# Altium PCB VCO.PcbDoc
Units mil, origin at the board's own origin, x right, y up, seen from the top; angles counter-clockwise.
Board outline 4000 x 4000 mil, 4 copper layers (Top Layer, GND, GND (Mid2), Bottom Layer), stack 30.634 mil thick; 243 components, 98 nets, 601 pads, 3 vias.
Unrouted connection lines stored in the file: 407.
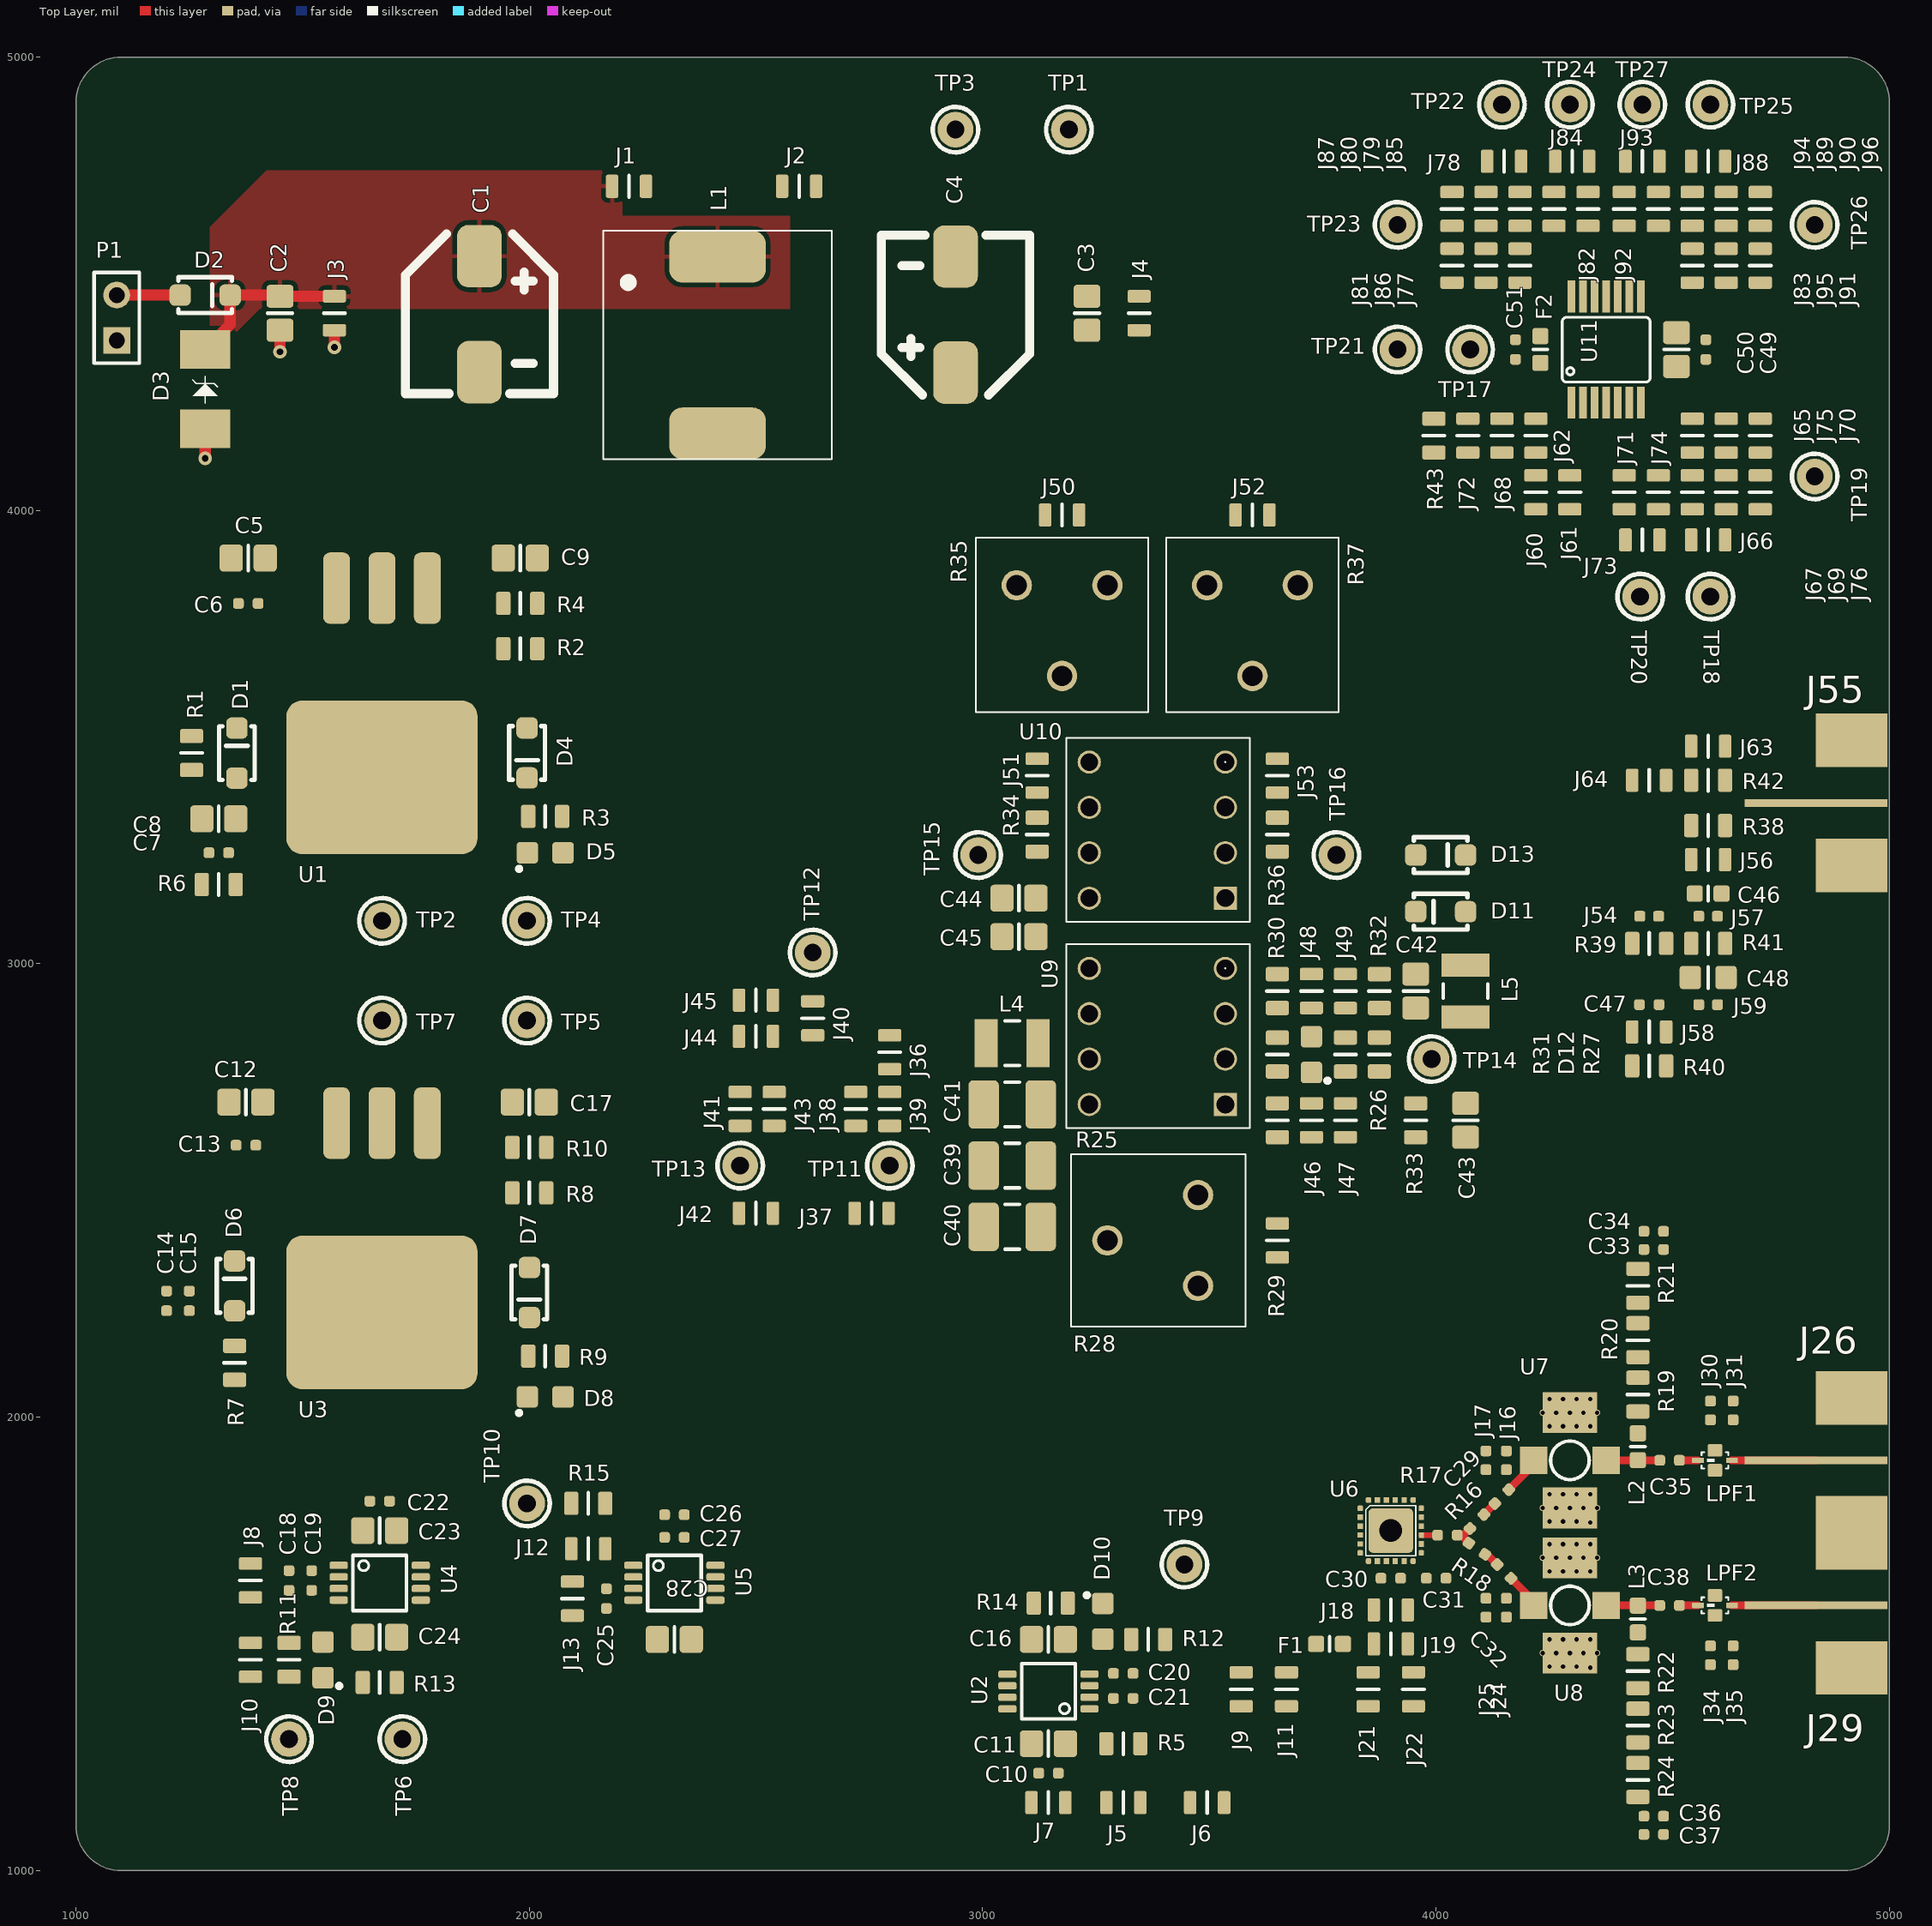
[diagram p0: Top Layer view]
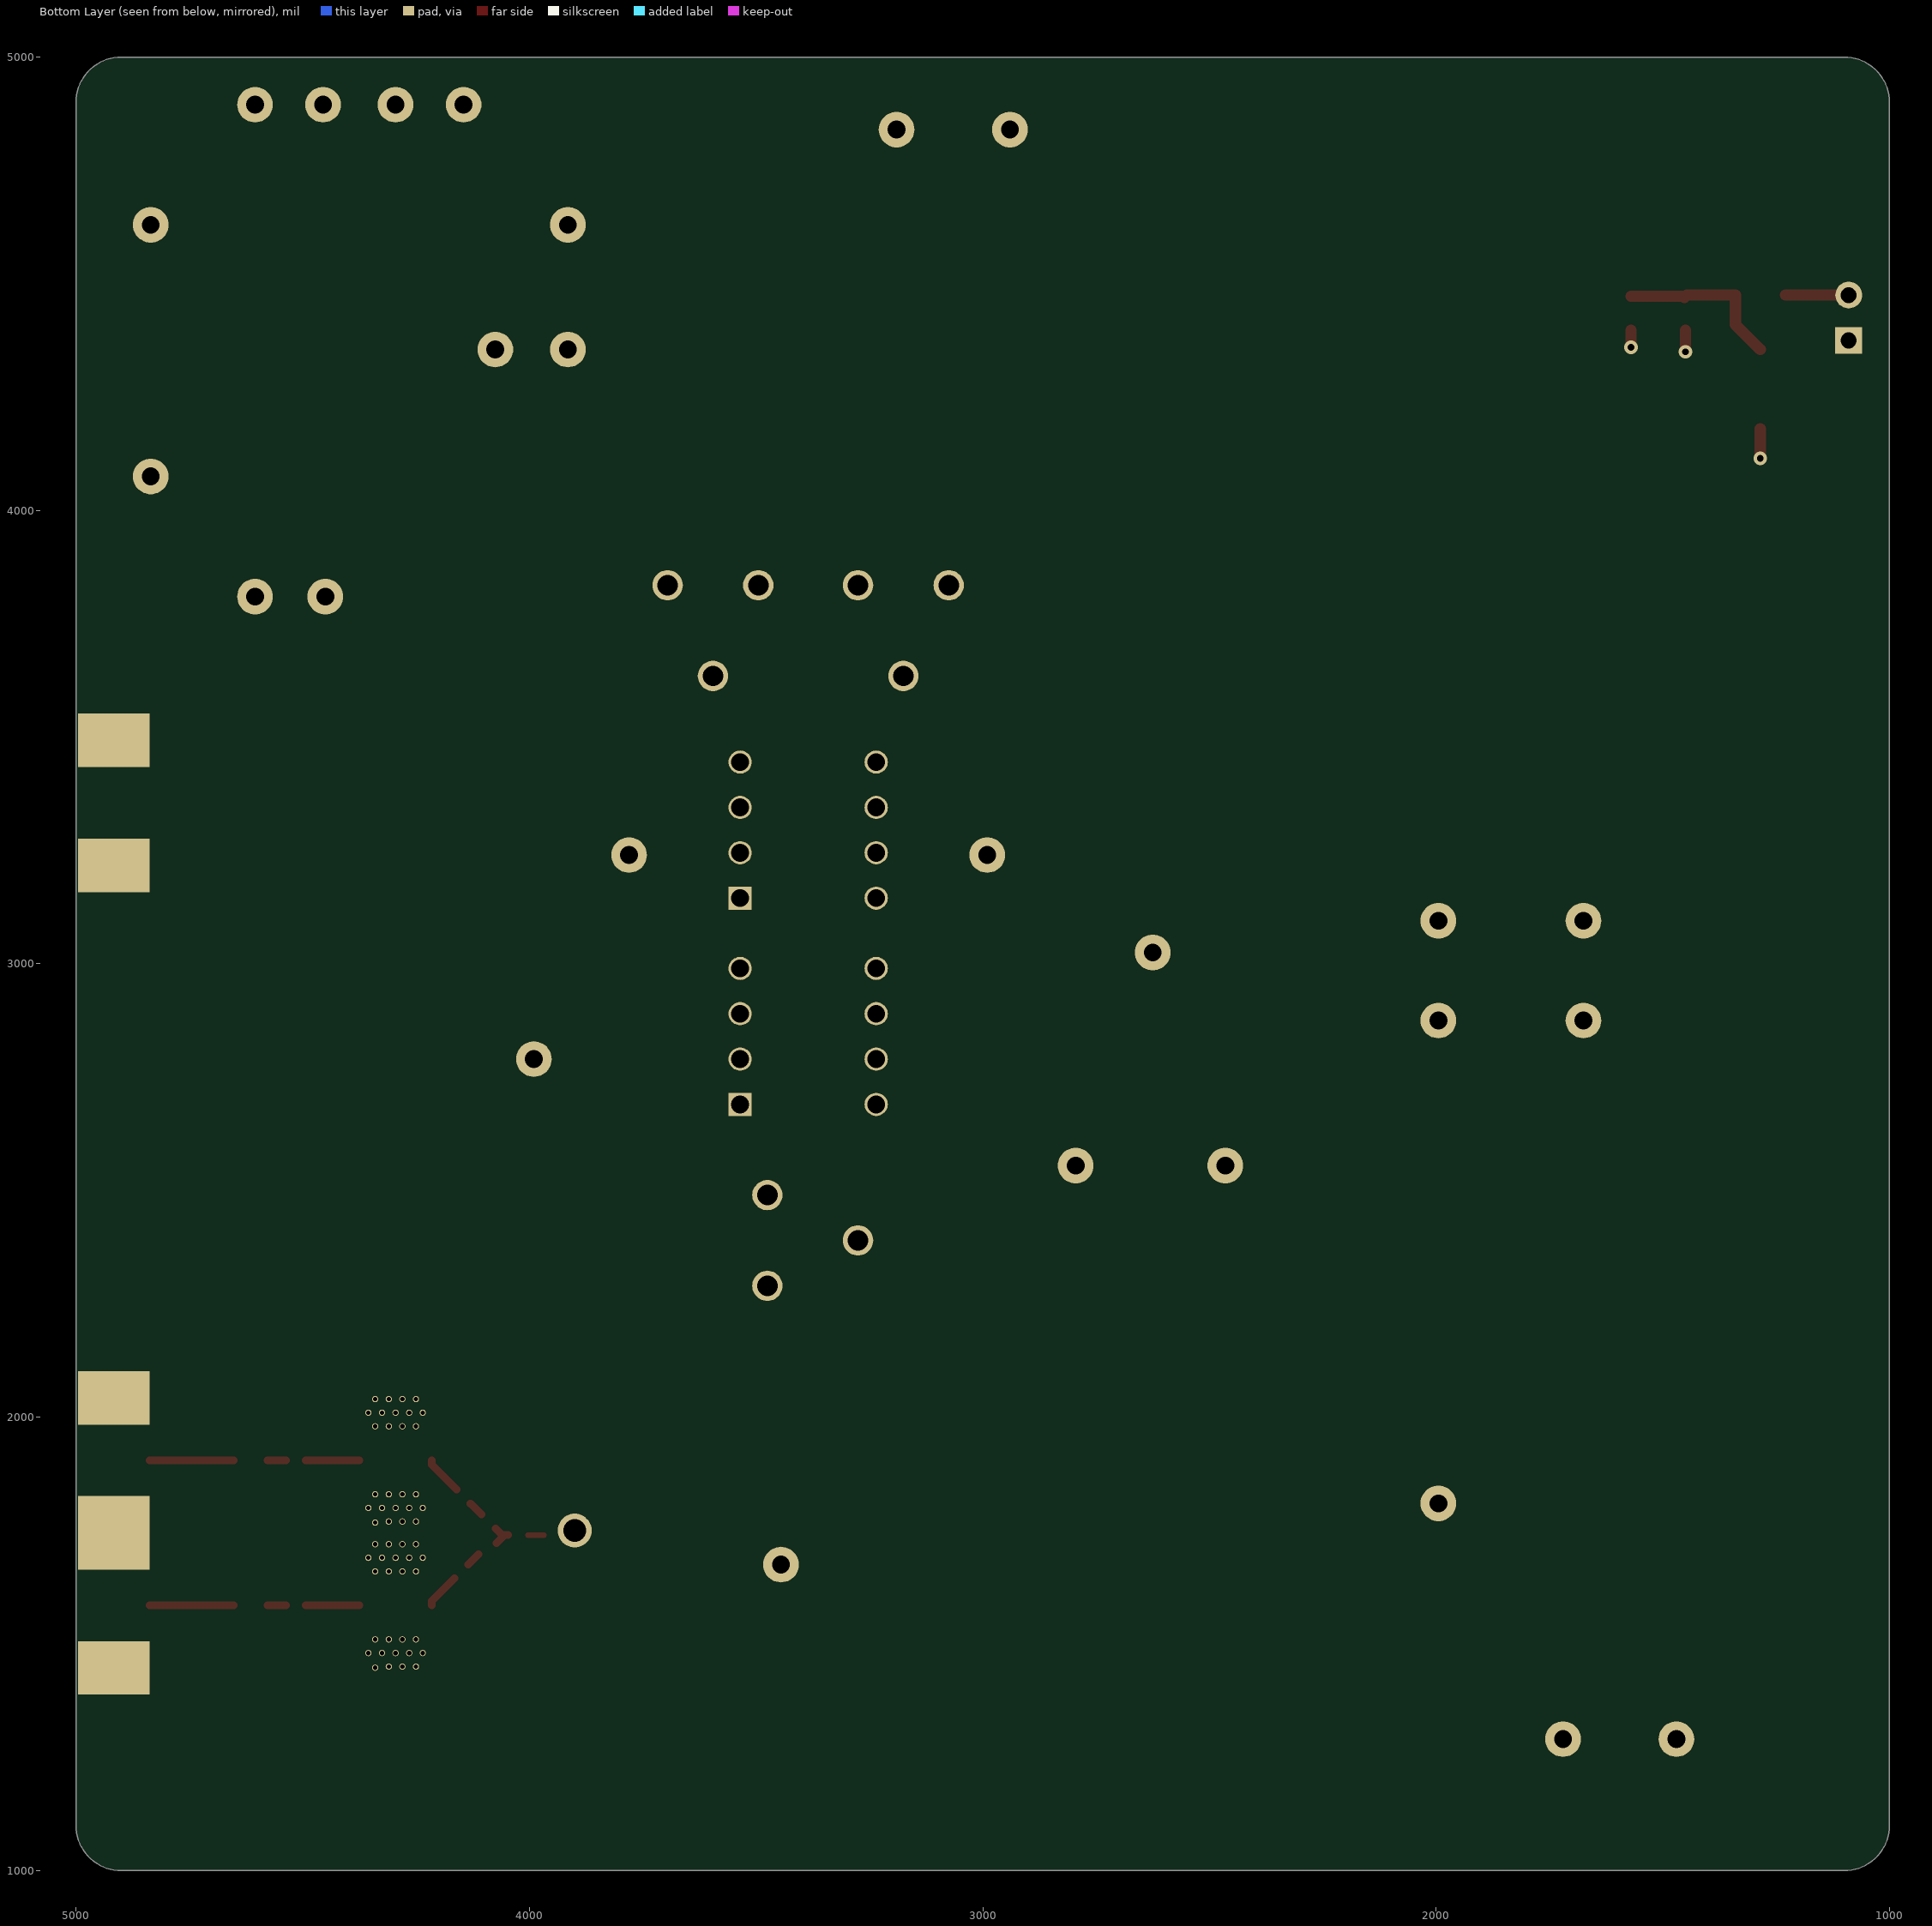
[diagram p1: Bottom Layer view, seen from below]
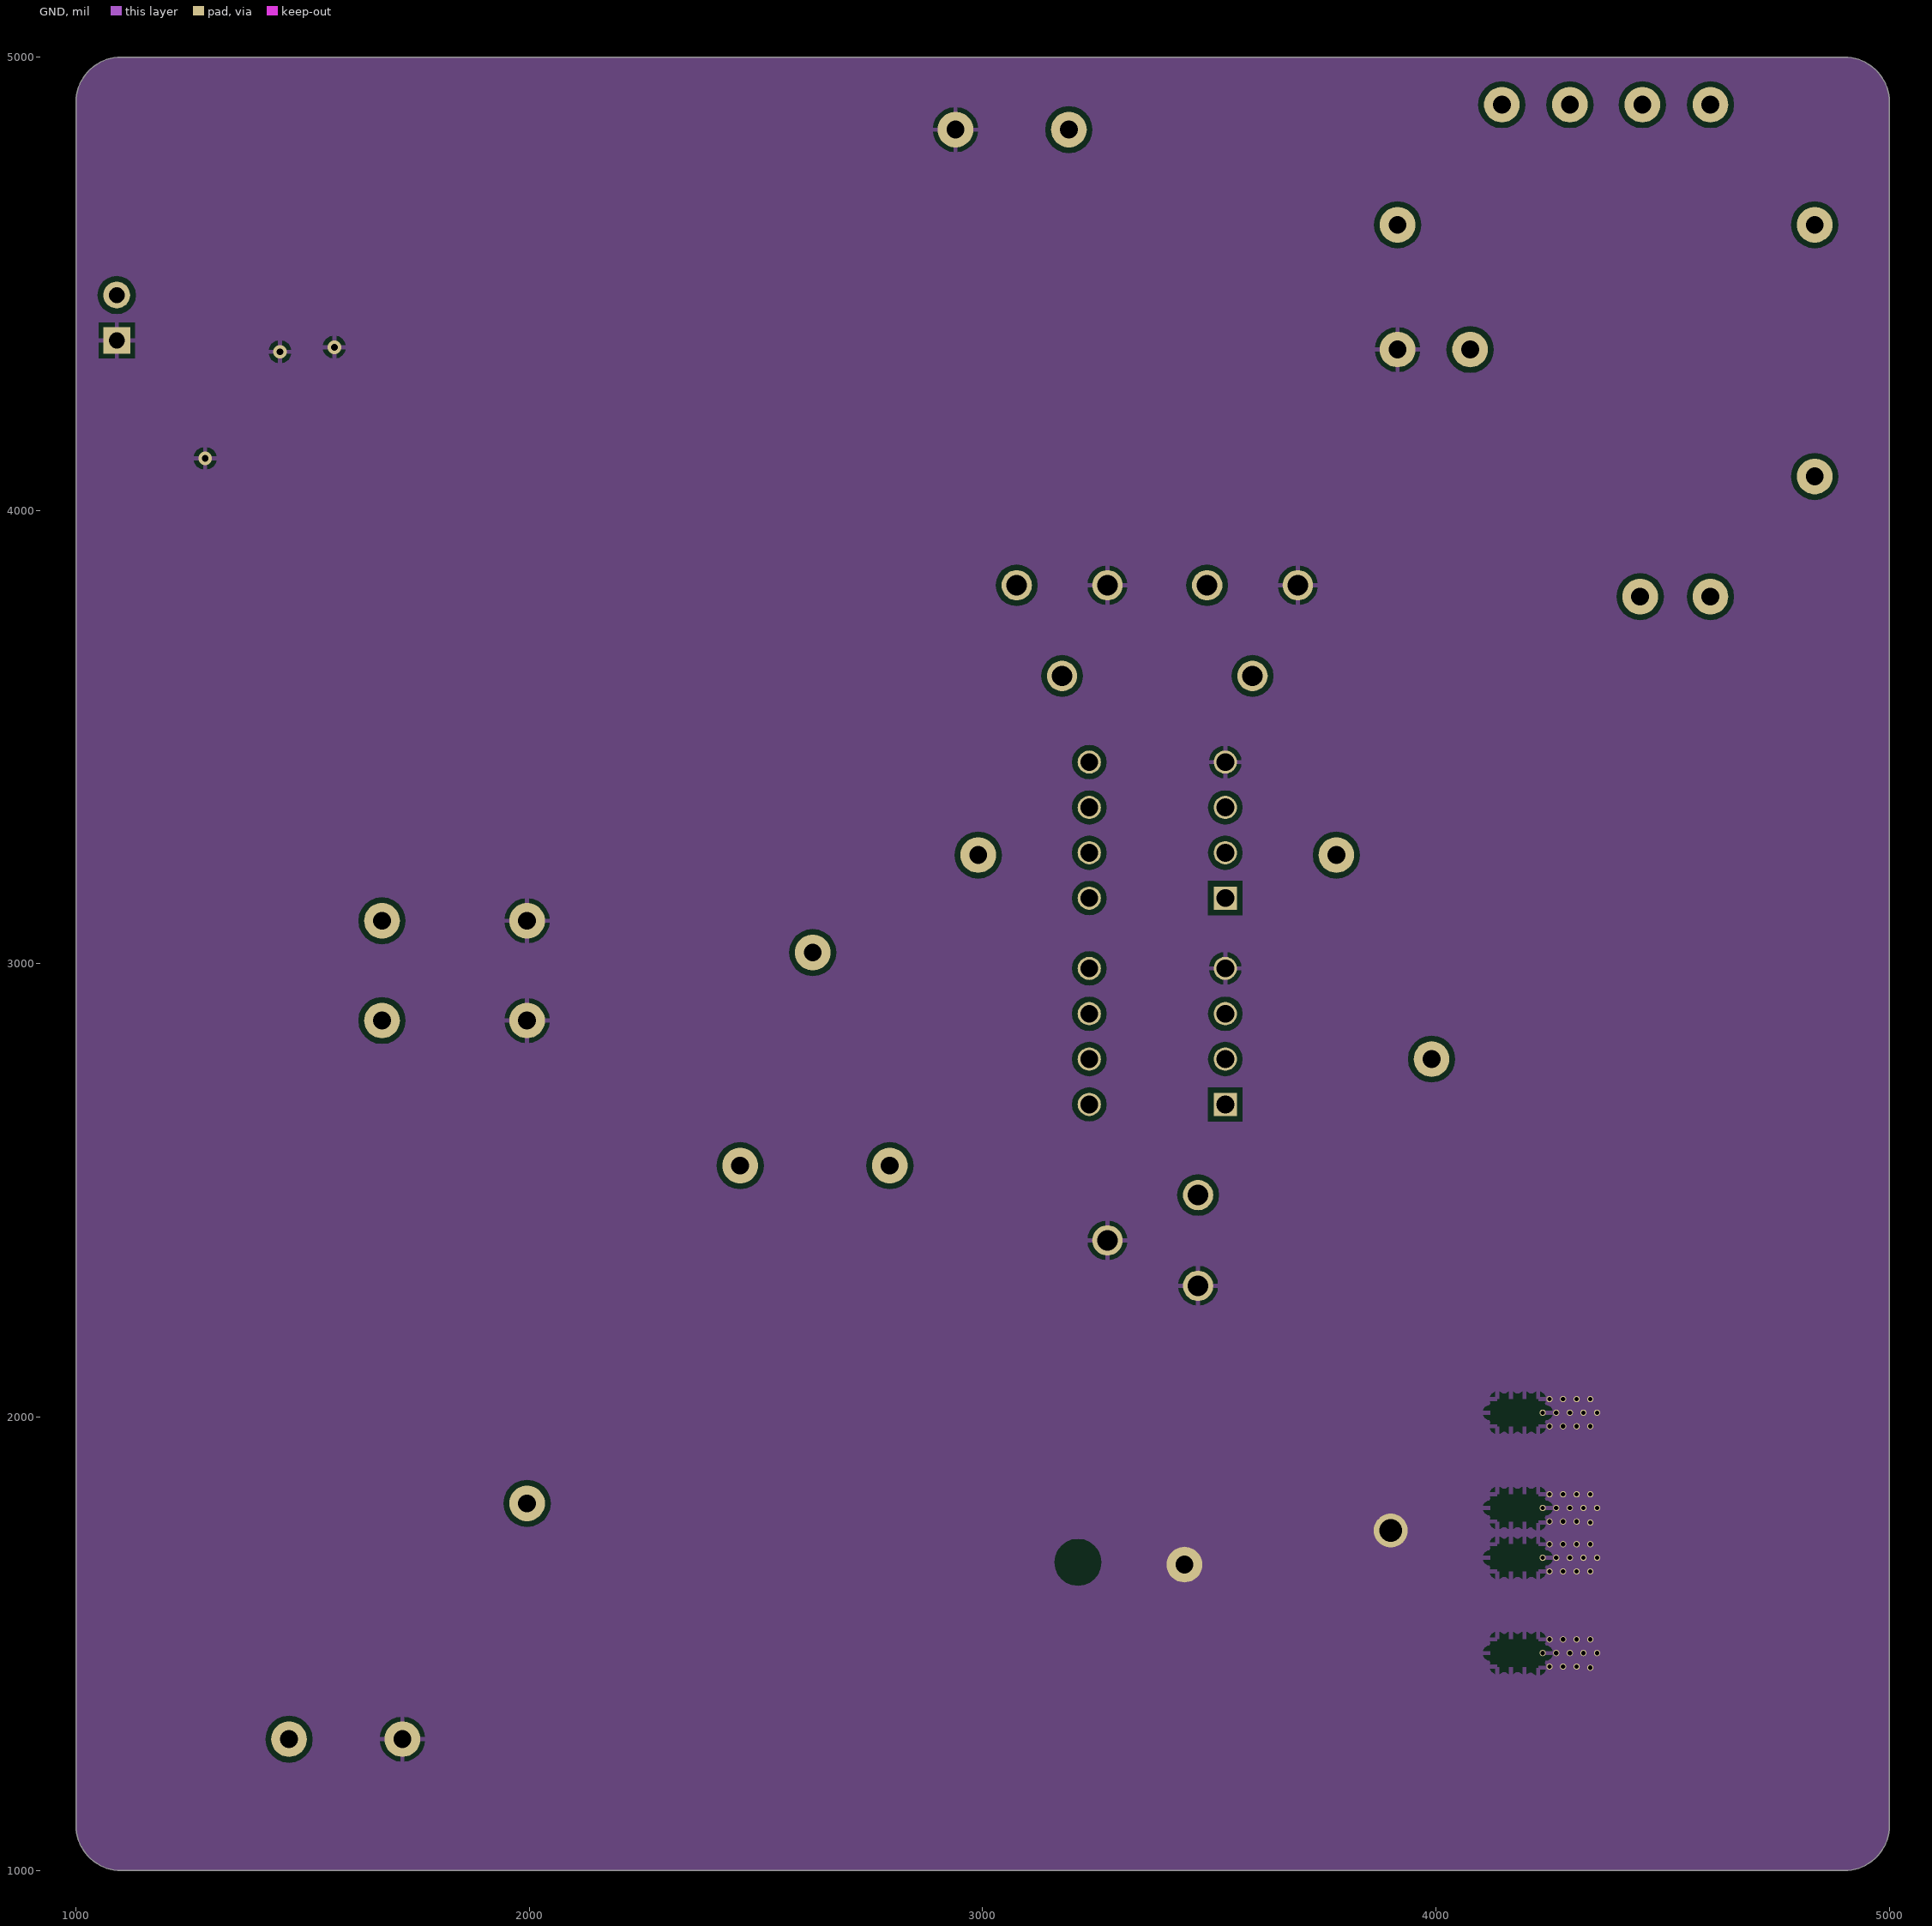
[diagram p2: GND]
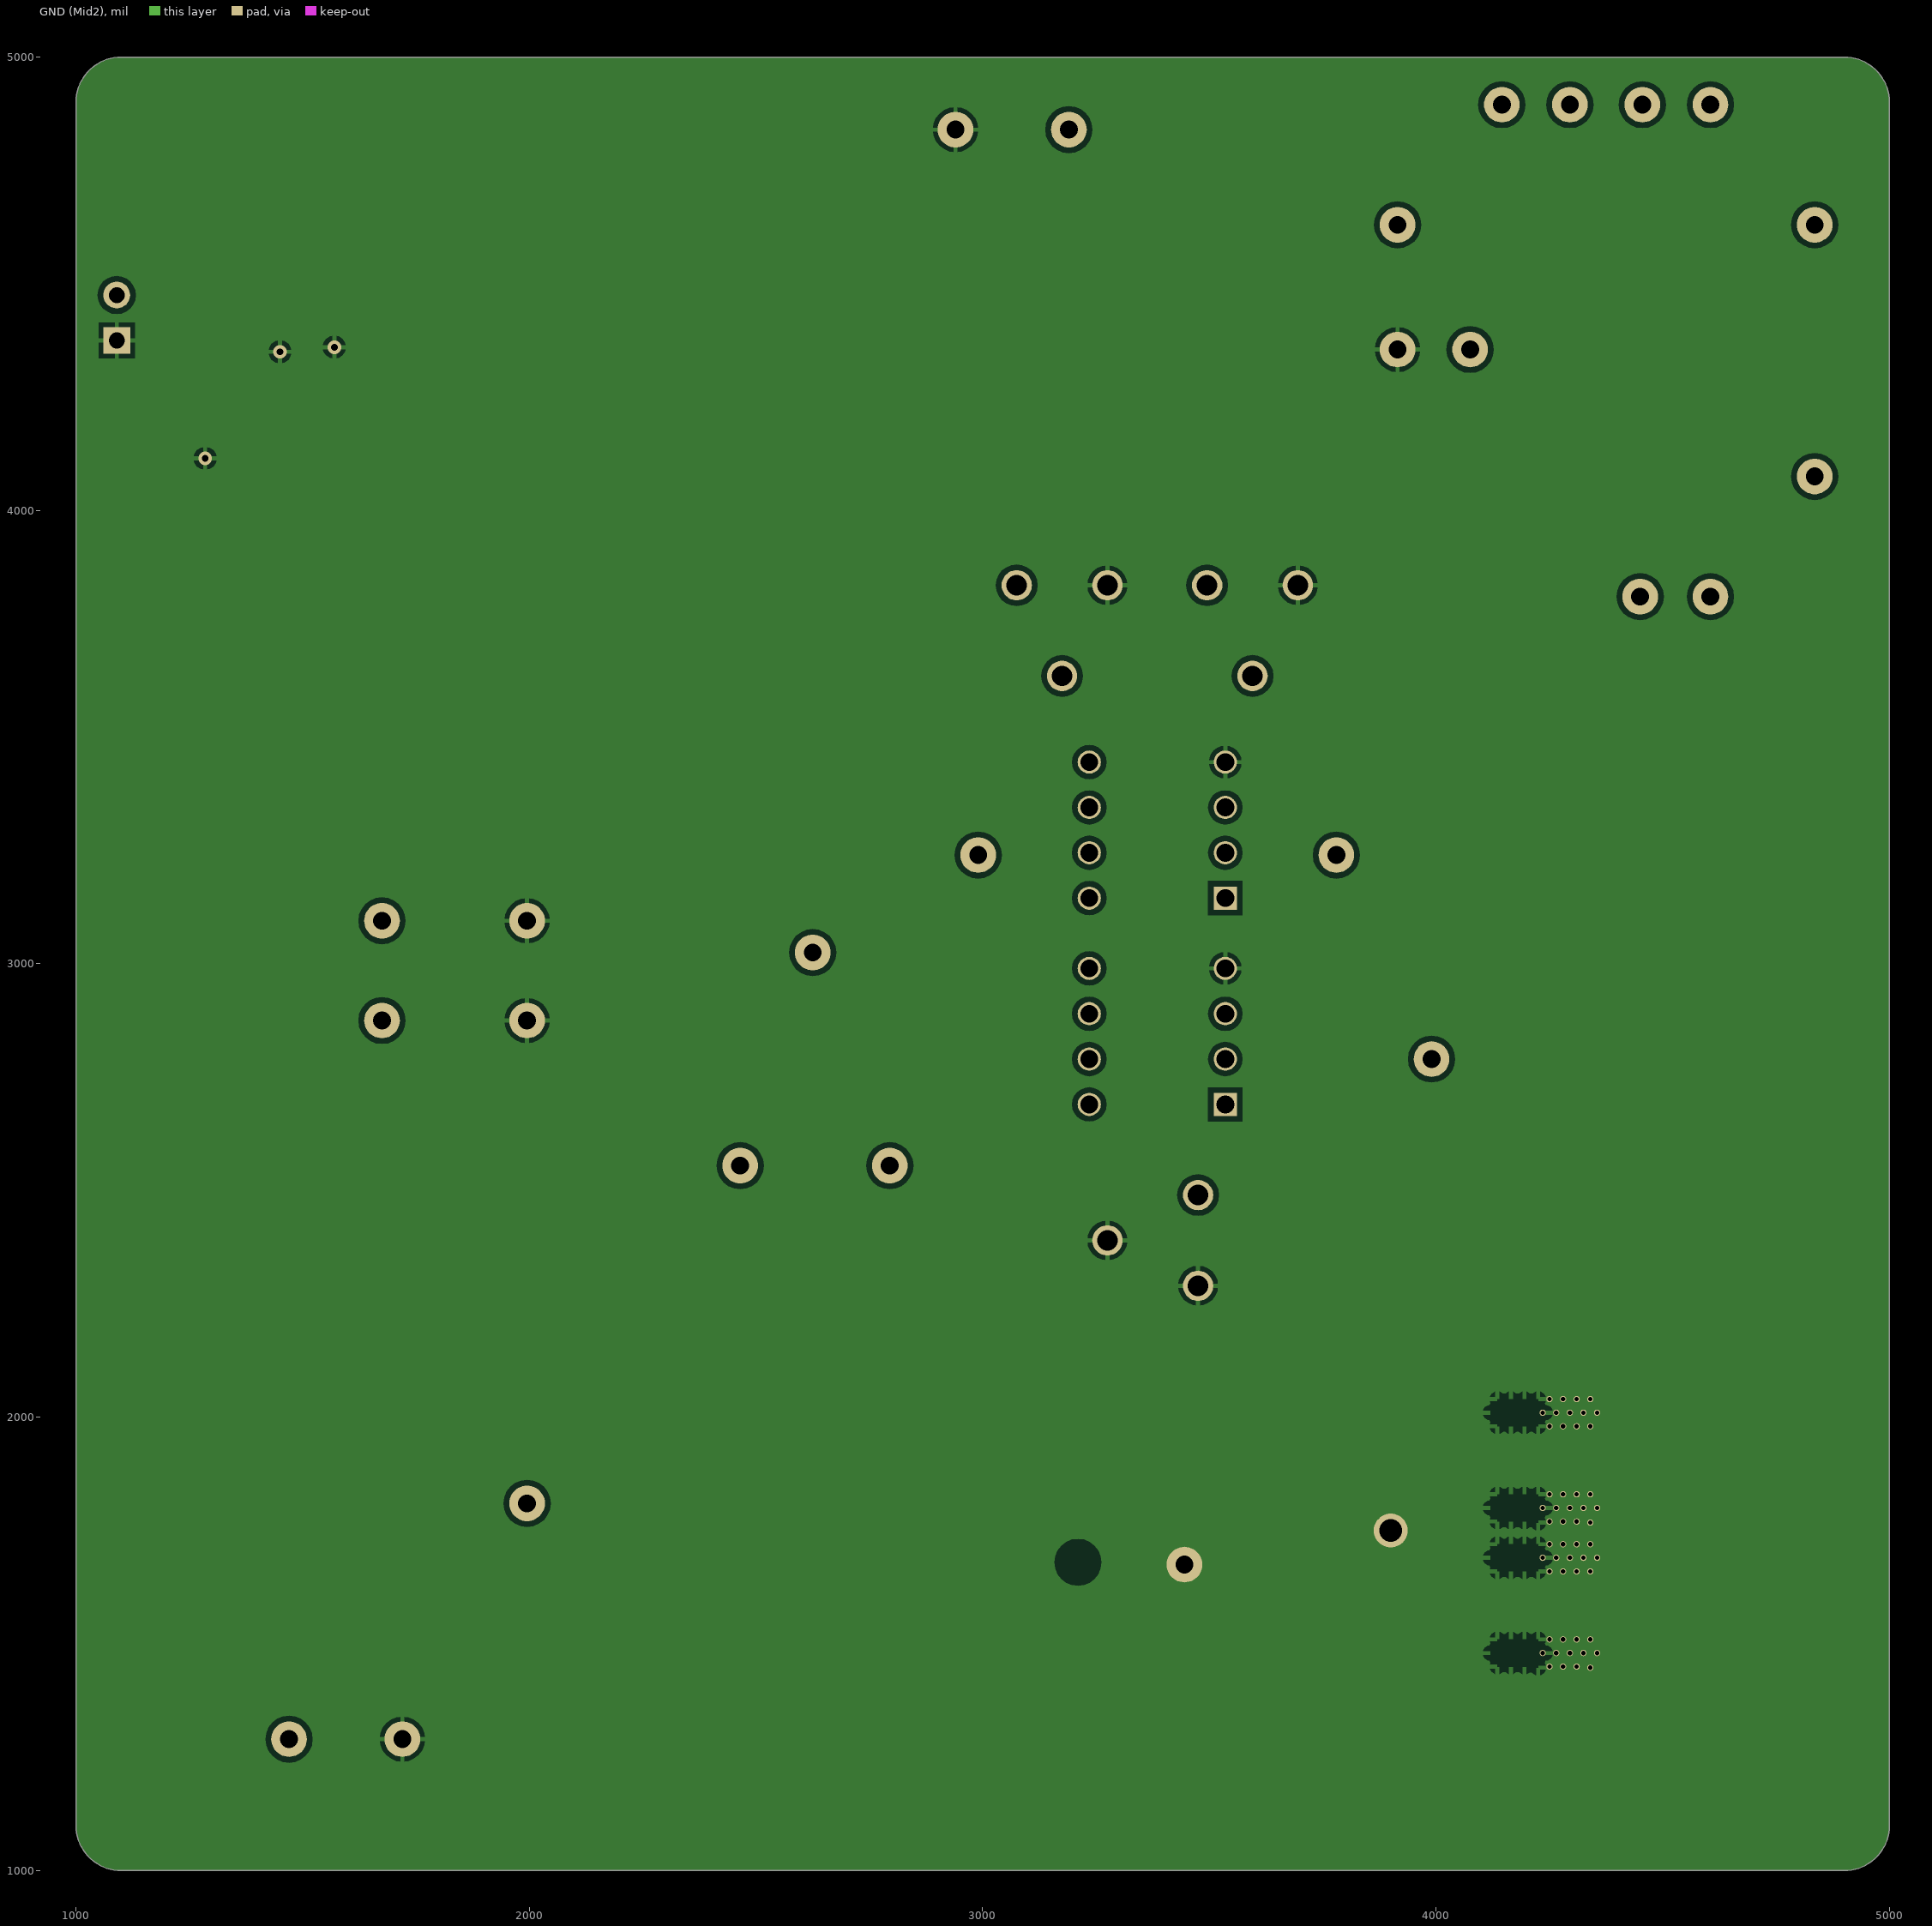
[diagram p3: GND (Mid2)]

## Layer stack, top to bottom
Top Solder: solder mask 0.4, Solder Resist, Dk 3.5
Top Layer: signal copper 1.4
Dielectric 1: core 10, FR-4, Dk 4.2
GND: signal copper 1.417
Dielectric 3: prepreg 5, Dk 4.2
GND (Mid2): signal copper 1.417
Dielectric 2: core 10, Dk 4.2
Bottom Layer: signal copper 1.4
Bottom Solder: solder mask 0.4, Solder Resist, Dk 3.5

## Board outline
1000,4500 1000,4900 cw(c1100,4900) 1100,5000 1300,5000 4740,5000 4900,5000 cw(c4900,4900) 5000,4900 5000,1175 5000,1100 cw(c4900,1100) 4900,1000 1255,1000 1100,1000 cw(c1100,1100) 1000,1100 1000,4500

## Design rules (kind name [scope] priority, off if disabled: settings)
Clearance "Polygon Clerance" [InPolygon] p1: gap=12
Clearance "General Clerance Rule" [All] p2: gap=6
HoleSize [All] p1: absolutevalues=TRUE maxlimit=100 minlimit=10 maxpercent=80.000 minpercent=20.000
MinimumSolderMaskSliver [All] p1: minsoldermaskwidth=4
PlaneClearance [All] p1: clearance=15
PlaneConnect [All] p1: planeconnectstyle=Relief reliefexpansion=6 reliefentries=4 reliefconductorwidth=10 reliefairgap=6
PolygonConnect [All] p1: connectstyle=Relief reliefconductorwidth=10 reliefentries=4 polygonreliefangle="90 Angle" airgapwidth=10
RoomDefinition OpAmp [InComponentClass('OpAmp')] p1: confinementstyle=ConfineIn formatcopy=TRUE lockcomponents=FALSE outline 0,0 2000,0 2000,1000 0,1000
RoomDefinition "Active/Passive PLL Filters" [InComponentClass('Active/Passive PLL Filters')] p2: confinementstyle=ConfineIn formatcopy=TRUE lockcomponents=FALSE outline 0,0 2000,0 2000,1000 0,1000
RoutingVias [All] p1: holewidth=10 width=22 viastyle="Through Hole" minholewidth=10 minwidth=20 maxholewidth=35 maxwidth=50
SilkToSilkClearance [All] p1: silktosilkclearance=6
SolderMaskExpansion [All] p1: expansion=4
Width TrackEnds [All] p1: maxlimit=100 minlimit=6 preferedwidth=10 checkconnectedcopper=TRUE
Width [All] p2: maxlimit=100 minlimit=6 preferedwidth=10
24 further rules are at their usual default settings.

## Classes and differential pairs
component class "Voltage Regulators": C1 C2 C3 C4 C5 C6 C7 C8 C9 C10 C11 C12 C13 C14 C15 C16 C17 C18 C19 C20 C21 C22 C23 C24 C25 C26 C27 C28 D1 D2 D3 D4 D5 D6 D7 D8 D9 D10 J1 J2 J3 J4 J5 J6 J7 J8 J9 J10 J11 J12 J13 L1 P1 R1 R2 R3 R4 R5 R6 R7 R8 R9 R10 R11 R12 R13 R14 R15 TP1 TP2 TP3 TP4 TP5 TP6 TP7 TP8 TP9 TP10 U1 U2 U3 U4 U5
component class "VCO and Buffer": C29 C30 C31 C32 C33 C34 C35 C36 C37 C38 F1 J16 J17 J18 J19 J21 J22 J24 J25 J26 J29 J30 J31 J34 J35 L2 L3 LPF1 LPF2 R16 R17 R18 R19 R20 R21 R22 R23 R24 U6 U7 U8
component class "Active/Passive PLL Filters": C46 C47 C48 C49 C50 C51 F2 J54 J55 J56 J57 J58 J59 J60 J61 J62 J63 J64 J65 J66 J67 J68 J69 J70 J71 J72 J73 J74 J75 J76 J77 J78 J79 J80 J81 J82 J83 J84 J85 J86 J87 J88 J89 J90 J91 J92 J93 J94 J95 J96 R38 R39 R40 R41 R42 R43 TP17 TP18 TP19 TP20 TP21 TP22 TP23 TP24 TP25 TP26 TP27 U11
component class OpAmp: C39 C40 C41 C42 C43 C44 C45 D11 D12 D13 J36 J37 J38 J39 J40 J41 J42 J43 J44 J45 J46 J47 J48 J49 J50 J51 J52 J53 L4 L5 R25 R26 R27 R28 R29 R30 R31 R32 R33 R34 R35 R36 R37 TP11 TP12 TP13 TP14 TP15 TP16 U9 U10

## Components (designator, comment, footprint, x,y, rotation, side; value= is the part's Value field where it differs from the comment)
C1 "100µF" Radial-SMD-8x10mm 1890,4305 r0 top
C2 "10µF" C0805-1.25MM 1450,4435 r90 top
C3 "10µF" C0805-1.25MM 3230,4435 r270 top
C4 "100µF" Radial-SMD-8x10mm 2940,4560 r180 top
C5 "10µF" C0805-1.25MM 1380,3895 r0 top
C6 "2.2µF" 0402-0.55mm 1380,3795 r0 top
C7 "2.2µF" 0402-0.55mm 1315,3245 r0 top
C8 "10µF" C0805-1.25MM 1315,3320 r0 top
C9 "10µF" C0805-1.25MM 1980,3895 r180 top
C10 "2.2µF" 0402-0.55mm 3145,1215 r0 top
C11 "10µF" C0805-1.25MM 3145,1280 r0 top
C12 "10µF" C0805-1.25MM 1375,2695 r0 top
C13 "2.2µF" 0402-0.55mm 1375,2600 r0 top
C14 "10µF" 0402-0.55mm 1200,2256.65 r270 top
C15 "10µF" 0402-0.55mm 1250,2256.65 r270 top
C16 "10nF" C0805-1.25MM 3145,1510 r0 top
C17 "10µF" C0805-1.25MM 2000,2695 r180 top
C18 "10µF" 0402-0.55mm 1470,1640 r270 top
C19 "10µF" 0402-0.55mm 1520,1640 r270 top
C20 "10µF" 0402-0.55mm 3310,1435 r180 top
C21 "10µF" 0402-0.55mm 3310,1380 r180 top
C22 "2.2µF" 0402-0.55mm 1670,1815 r180 top
C23 "10µF" C0805-1.25MM 1670,1750 r180 top
C24 "10nF" C0805-1.25MM 1670,1515 r180 top
C25 "10µF" 0402-0.55mm 2170,1600 r270 top
C26 "10µF" 0402-0.55mm 2320,1785 r0 top
C27 "10µF" 0402-0.55mm 2320,1735 r0 top
C28 "10nF" C0805-1.25MM 2320,1510 r180 top
C29 "390pF" 0402-0.55mm 4145,1825 r45 top
C30 "10µF" 0402-0.55mm 3900,1645 r0 top
C31 "10µF" 0402-0.55mm 4000,1645 r180 top
C32 "390pF" 0402-0.55mm 4150,1660 r315 top
C33 "2.2µF" 0402-0.55mm 4480,2370 r180 top
C34 "2.2µF" 0402-0.55mm 4480,2410 r180 top
C35 "100pF" 0402-0.55mm 4515,1905 r0 top
C36 "2.2µF" 0402-0.55mm 4480,1120 r180 top
C37 "2.2µF" 0402-0.55mm 4480,1080 r180 top
C38 "100pF" 0402-0.55mm 4515,1585 r0 top
C39 "10µF" C1210-2.5mm 3065,2555 r180 top
C40 "10µF" C1210-2.5mm 3065,2420 r180 top
C41 "10µF" C1210-2.5mm 3065,2690 r180 top
C42 "680pF" C0805-1.25MM 3955,2940 r270 top
C43 "680pF" C0805-1.25MM 4065,2655 r90 top
C44 "0.1µF" C0805-1.25MM 3080,3145 r180 top
C45 "0.1µF" C0805-1.25MM 3080,3060 r180 top
C46 "0.082µF" C0603-0.8MM 4600,3155 r180 top
C47 "56pF" 0402-0.55mm 4470,2910 r180 top
C48 "0.39µF" 0805-1.35MM 4600,2970 r0 top
C49 "2.2µF" 0402-0.55mm 4595,4355 r270 top
C50 "10µF" C0805-1.25MM 4530,4355 r270 top
C51 "2.2µF" 0402-0.55mm 4175,4355 r90 top
D1 "SCHOTTKY" SOD-123f 1355,3520 r270 top
D2 "SCHOTTKY" SOD-123f 1340,4475 r180 top
D3 "ZENER" DO-214AA 1285,4355 r270 top
D4 "SCHOTTKY" SOD-123f 1995,3410 r90 top
D5 "2.2V (20mA)" 0805-LED 2035,3245 r180 top
D6 "SCHOTTKY" SOD-123f 1350,2345 r270 top
D7 "SCHOTTKY" SOD-123f 2000,2220 r90 top
D8 "2.2V (20mA)" 0805-LED 2035,2045 r180 top
D9 "2.2V (20mA)" 0805-LED 1545,1465 r270 top
D10 "2.2V (20mA)" 0805-LED 3265,1550 r90 top
D11 "SCHOTTKY" SOD-123f 3955,3115 r0 top
D12 "2.2V (20mA)" 0805-LED 3725,2800 r270 top
D13 "SCHOTTKY" SOD-123f 4065,3240 r180 top
F1 "FER" 0603-0.8mm 3765,1500 r180 top
F2 "FER" 0603-0.8mm 4230,4355 r270 top
J1 "GEN-PAD" 0805-DNP 2220,4715 r180 top
J2 "GEN-PAD" 0805-DNP 2595,4715 r180 top
J3 "GEN-PAD" 0805-DNP 1570,4435 r270 top
J4 "GEN-PAD" 0805-DNP 3345,4435 r90 top
J5 "GEN-PAD" 0805-DNP 3310,1150 r0 top
J6 "GEN-PAD" 0805-DNP 3495,1150 r0 top
J7 "GEN-PAD" 0805-DNP 3145,1150 r180 top
J8 "GEN-PAD" 0805-DNP 1385,1640 r270 top
J9 "GEN-PAD" 0805-DNP 3570,1400 r270 top
J10 "GEN-PAD" 0805-DNP 1385,1465 r270 top
J11 "GEN-PAD" 0805-DNP 3670,1400 r90 top
J12 "GEN-PAD" 0805-DNP 2130,1710 r180 top
J13 "GEN-PAD" 0805-DNP 2095,1600 r270 top
J16 "GEN-PAD" 0402-DNP 4155,1905 r90 top
J17 "GEN-PAD" 0402-DNP 4110,1905 r90 top
J18 "GEN-PAD" 0805-DNP 3900,1575 r180 top
J19 "GEN-PAD" 0805-DNP 3900,1500 r180 top
J21 "GEN-PAD" 0805-DNP 3850,1400 r270 top
J22 "GEN-PAD" 0805-DNP 3950,1400 r270 top
J24 "GEN-PAD" 0402-DNP 4155,1580 r270 top
J25 "GEN-PAD" 0402-DNP 4110,1580 r270 top
J26 "CON-SMA" CON-COAX 4995,1905 r0 top
J29 "CON-SMA" CON-COAX 4995,1585 r0 top
J30 "GEN-PAD" 0402-DNP 4605,2015 r90 top
J31 "GEN-PAD" 0402-DNP 4655,2015 r90 top
J34 "GEN-PAD" 0402-DNP 4605,1475 r270 top
J35 "GEN-PAD" 0402-DNP 4655,1475 r270 top
J36 "GEN-PAD" 0805-DNP 2795,2805 r270 top
J37 "GEN-PAD" 0805-DNP 2755,2450 r0 top
J38 "GEN-PAD" 0805-DNP 2720,2680 r90 top
J39 "GEN-PAD" 0805-DNP 2795,2680 r270 top
J40 "GEN-PAD" 0805-DNP 2625,2880 r90 top
J41 "GEN-PAD" 0805-DNP 2465,2680 r90 top
J42 "GEN-PAD" 0805-DNP 2500,2450 r180 top
J43 "GEN-PAD" 0805-DNP 2540,2680 r90 top
J44 "GEN-PAD" 0805-DNP 2500,2840 r180 top
J45 "GEN-PAD" 0805-DNP 2500,2920 r0 top
J46 "GEN-PAD" 0805-DNP 3725,2655 r270 top
J47 "GEN-PAD" 0805-DNP 3800,2655 r270 top
J48 "GEN-PAD" 0805-DNP 3725,2940 r90 top
J49 "GEN-PAD" 0805-DNP 3800,2940 r270 top
J50 "GEN-PAD" 0805-DNP 3175,3990 r0 top
J51 "GEN-PAD" 0805-DNP 3120,3415 r90 top
J52 "GEN-PAD" 0805-DNP 3595,3990 r0 top
J53 "GEN-PAD" 0805-DNP 3650,3415 r90 top
J54 "GEN-PAD" 0402-DNP 4470,3105 r180 top
J55 "CON-SMA" CON-COAX 4995,3355 r0 top
J56 "GEN-PAD" 0805-DNP 4600,3230 r0 top
J57 "GEN-PAD" 0402-DNP 4600,3105 r0 top
J58 "GEN-PAD" 0805-DNP 4470,2850 r0 top
J59 "GEN-PAD" 0402-DNP 4600,2910 r180 top
J60 "GEN-PAD" 0805-DNP 4220,4040 r90 top
J61 "GEN-PAD" 0805-DNP 4295,4040 r270 top
J62 "GEN-PAD" 0805-DNP 4220,4165 r270 top
J63 "GEN-PAD" 0805-DNP 4600,3480 r0 top
J64 "GEN-PAD" 0805-DNP 4470,3405 r180 top
J65 "GEN-PAD" 0805-DNP 4565,4165 r270 top
J66 "GEN-PAD" 0805-DNP 4600,3935 r0 top
J67 "GEN-PAD" 0805-DNP 4565,4040 r90 top
J68 "GEN-PAD" 0805-DNP 4145,4165 r90 top
J69 "GEN-PAD" 0805-DNP 4640,4040 r270 top
J70 "GEN-PAD" 0805-DNP 4715,4165 r270 top
J71 "GEN-PAD" 0805-DNP 4415,4040 r270 top
J72 "GEN-PAD" 0805-DNP 4070,4165 r90 top
J73 "GEN-PAD" 0805-DNP 4455,3935 r0 top
J74 "GEN-PAD" 0805-DNP 4490,4040 r270 top
J75 "GEN-PAD" 0805-DNP 4640,4165 r90 top
J76 "GEN-PAD" 0805-DNP 4715,4040 r90 top
J77 "GEN-PAD" 0805-DNP 4185,4540 r90 top
J78 "GEN-PAD" 0805-DNP 4150,4770 r180 top
J79 "GEN-PAD" 0805-DNP 4185,4665 r270 top
J80 "GEN-PAD" 0805-DNP 4110,4665 r90 top
J81 "GEN-PAD" 0805-DNP 4035,4540 r90 top
J82 "GEN-PAD" 0805-DNP 4335,4665 r90 top
J83 "GEN-PAD" 0805-DNP 4565,4540 r90 top
J84 "GEN-PAD" 0805-DNP 4300,4770 r180 top
J85 "GEN-PAD" 0805-DNP 4260,4665 r90 top
J86 "GEN-PAD" 0805-DNP 4110,4540 r270 top
J87 "GEN-PAD" 0805-DNP 4035,4665 r270 top
J88 "GEN-PAD" 0805-DNP 4600,4770 r0 top
J89 "GEN-PAD" 0805-DNP 4565,4665 r270 top
J90 "GEN-PAD" 0805-DNP 4640,4665 r90 top
J91 "GEN-PAD" 0805-DNP 4715,4540 r90 top
J92 "GEN-PAD" 0805-DNP 4415,4665 r90 top
J93 "GEN-PAD" 0805-DNP 4455,4770 r0 top
J94 "GEN-PAD" 0805-DNP 4490,4665 r90 top
J95 "GEN-PAD" 0805-DNP 4640,4540 r270 top
J96 "GEN-PAD" 0805-DNP 4715,4665 r270 top
L1 "L" 7447709471 2415,4365 r270 top
L2 "L" L0603-0.8mm 4445,1935 r90 top
L3 "L" L0603-0.8mm 4445,1555 r270 top
L4 "L" L1210 3065,2825 r180 top
L5 "L" L1210 4065,2940 r270 top
LPF1 "LFCW-1062+" LPF-0603-0.8mm 4615,1905 r0 top
LPF2 "LFCW-1062+" LPF-0603-0.8mm 4615,1585 r0 top
P1 "Header 2" HDR1X2 1090,4375 r90 top
R1 "0" 0805-0.45MM 1255,3465 r270 top
R2 "100" 0805-0.45MM 1980,3695 r0 top
R3 "3.48k" 0805-0.45MM 2035,3325 r180 top
R4 "1.5k" 0805-0.45MM 1980,3795 r180 top
R5 "0" 0805-0.45MM 3310,1280 r180 top
R6 "0" 0805-0.45MM 1315,3175 r180 top
R7 "0" 0805-0.45MM 1350,2120 r270 top
R8 "100" 0805-0.45MM 2000,2495 r0 top
R9 "1.1k" 0805-0.45MM 2035,2135 r180 top
R10 "560" 0805-0.45MM 2000,2595 r180 top
R11 "0" 0805-0.45MM 1470,1465 r270 top
R12 "0" 0805-0.45MM 3365,1510 r180 top
R13 "560" 0805-0.45MM 1670,1415 r180 top
R14 "560" 0805-0.45MM 3150,1590 r0 top
R15 "0" 0805-0.45MM 2130,1810 r180 top
R16 "16" 0402-0.55mm 4090,1770 r45 top
R17 "16" 0402-0.55mm 4025,1740 r0 top
R18 "16" 0402-0.55mm 4090,1710 r325 top
R19 "20" 0805-0.45MM 4445,2050 r90 top
R20 "20" 0805-0.45MM 4445,2170 r90 top
R21 "20" 0805-0.45MM 4445,2290 r90 top
R22 "20" 0805-0.45MM 4445,1440 r270 top
R23 "20" 0805-0.45MM 4445,1320 r270 top
R24 "20" 0805-0.45MM 4445,1200 r270 top
R25 "30.1k" 0805-0.45MM 3650,2655 r90 top
R26 "0" 0805-0.45MM 3875,2800 r270 top
R27 "100" 0805-0.45MM 3800,2800 r90 top
R28 "20k" 3310Y 3475,2390 r90 top
R29 "DNP" 0805-DNP 3650,2390 r90 top
R30 "100k" 0805-0.45MM 3650,2940 r270 top
R31 "4.7k" 0805-0.45MM 3650,2800 r270 top
R32 "10" 0805-0.45MM 3875,2940 r90 top
R33 "10" 0805-0.45MM 3955,2655 r270 top
R34 "0" 0805-0.45MM 3120,3285 r90 top
R35 "100k" 3310Y 3175,3835 r180 top
R36 "0" 0805-0.45MM 3650,3285 r90 top
R37 "100k" 3310Y 3595,3835 r180 top
R38 "0" 0805-0.45MM 4600,3305 r180 top
R39 "91" 0805-0.45MM 4470,3045 r180 top
R40 "0" 0805-0.45MM 4470,2775 r0 top
R41 "300" 0805-0.45MM 4600,3045 r180 top
R42 "0" 0805-0.45MM 4600,3405 r180 top
R43 "0" 0805-0.45MM 3995,4165 r90 top
TP1 "TP-LOOP" TP-LOOP 3190,4840 r0 top
TP2 "TP-LOOP" TP-LOOP 1675,3095 r0 top
TP3 "TP-LOOP" TP-LOOP 2940,4840 r0 top
TP4 "TP-LOOP" TP-LOOP 1995,3095 r0 top
TP5 "TP-LOOP" TP-LOOP 1995,2875 r180 top
TP6 "TP-LOOP" TP-LOOP 1720,1290 r270 top
TP7 "TP-LOOP" TP-LOOP 1675,2875 r180 top
TP8 "TP-LOOP" TP-LOOP 1470,1290 r270 top
TP9 "TP-LOOP" TP-LOOP 3445,1675 r0 top
TP10 "TP-LOOP" TP-LOOP 1995,1810 r180 top
TP11 "TP-LOOP" TP-LOOP 2795,2555 r270 top
TP12 "TP-LOOP" TP-LOOP 2625,3025 r180 top
TP13 "TP-LOOP" TP-LOOP 2465,2555 r270 top
TP14 "TP-LOOP" TP-LOOP 3990,2790 r180 top
TP15 "TP-LOOP" TP-LOOP 2990,3240 r180 top
TP16 "TP-LOOP" TP-LOOP 3780,3240 r180 top
TP17 "TP-LOOP" TP-LOOP 4075,4355 r0 top
TP18 "TP-LOOP" TP-LOOP 4605,3810 r0 top
TP19 "TP-LOOP" TP-LOOP 4835,4075 r270 top
TP20 "TP-LOOP" TP-LOOP 4450,3810 r0 top
TP21 "TP-LOOP" TP-LOOP 3915,4355 r0 top
TP22 "TP-LOOP" TP-LOOP 4145,4895 r0 top
TP23 "TP-LOOP" TP-LOOP 3915,4630 r0 top
TP24 "TP-LOOP" TP-LOOP 4295,4895 r0 top
TP25 "TP-LOOP" TP-LOOP 4605,4895 r0 top
TP26 "TP-LOOP" TP-LOOP 4835,4630 r0 top
TP27 "TP-LOOP" TP-LOOP 4455,4895 r0 top
U1 "LM317KTTR" TO-263-4 1675,3620 r180 top
U2 "REG113" MSOP8 3145,1395 r180 top
U3 "LM317KTTR" TO-263-4 1675,2440 r180 top
U4 "REG113" MSOP8 1670,1635 r0 top
U5 "REG113" MSOP8 2320,1635 r0 top
U6 "RFVC1801" QFN-24-(4x4) 3900,1750 r0 top
U7 "NLB-310-T1" SOT-86 4295,1905 r0 top
U8 "NLB-310-T1" SOT-86 4295,1585 r0 top
U9 "A08-LC-TT" PDIP-8-(7.62mm)-SOCKET 3535,2690 r90 top
U10 "A08-LC-TT" PDIP-8-(7.62mm)-SOCKET 3535,3145 r90 top
U11 "OPA4188" TSSOP14 4375,4355 r0 top

## Footprints (in the part's own frame and the unit in brackets; to place one, negate y for a bottom-side part, rotate by r counter-clockwise, add the part's x,y. Pads: shape width x height; smd on the part's side, far side on the other; paste and mask are expansions set on the pad)
0402-0.55mm [mm] "Chip Capacitor, Body 1.0x0.5mm, IPC High Density"
  rrect50% 0.6x0.6 smd paste-0.06: 1(-0.55,0) 2(0.55,0)
  body extent -0.5,-0.25 0.5,0.25, height 0.5
0402-DNP [mm] "Chip Capacitor, Body 1.0x0.5mm, IPC High Density"
  rrect40% 0.6x0.6 smd paste-12.7: 1(-0.525,0) 2(0.525,0)
0603-0.8mm [mm] "Chip Capacitor, Body 1.6x0.8mm, IPC High Density"
  rrect30% 0.9x0.9 smd: 1(-0.75,0) 2(0.75,0)
  silkscreen extent 0,-0.4 0,0.4, body extent -0.8,-0.4 0.8,0.4, height 0.8
0805-0.45MM [mm]
  rrect30% 0.8x1.3 smd: 1(-0.95,0) 2(0.95,0)
  silkscreen extent 0,-0.6 0,0.6, body extent -1,-0.62 1,0.63, height 0.5
0805-1.35MM [mm] "Chip Capacitor, Body 1.25x2mm, IPC High Density"
  rrect30% 1.2x1.3 smd: 1(-1,0) 2(1,0)
  silkscreen extent 0,-0.6 0,0.6, body extent -1,-0.6 1,0.6, height 1.35
0805-DNP [mm]
  rrect30% 0.7x1.3 smd paste-12.7: 1(-0.95,0) 2(0.95,0)
  silkscreen extent 0,-0.6 0,0.6
0805-LED [mm]
  rrect30% 1.2x1.2 smd: A(-1,0) C(1,0)
  silkscreen extent 1.43,0.86 1.5,0.94, body extent -1.01,-0.63 1.01,0.62, height 1.1
3310Y [mil]
  round 67 hole 45.28: 1(100,0) 2(0,200) 3(-100,0)
  silkscreen extent -190,-105 190,280, body extent -187,-100 188,275, height 678
7447709471 [mm] "Wurth Non-standard Footprint"
  rrect50% 2.9x5.4 smd: 1(-4.95,0) 2(4.95,0)
  silkscreen extent -6.4,-6.4 6.4,6.4, body extent -6,-6 6,6, height 10
C0603-0.8MM [mm] "Chip Capacitor, Body 1.6x0.8mm, IPC High Density"
  rrect30% 0.9x0.9 smd: 1(-0.75,0) 2(0.75,0)
  silkscreen extent 0,-0.4 0,0.4, body extent -0.8,-0.4 0.8,0.4, height 0.8
C0805-1.25MM [mm]
  rrect30% 1.3x1.5 smd: 1(-0.95,0) 2(0.95,0)
  silkscreen extent 0,-0.7 0,0.7, body extent -1,-0.62 1,0.63, height 1.25
C1210-2.5mm [mm] "Chip Capacitor, Body 3.2x2.5mm, IPC Medium Density"
  rrect30% 1.7x2.7 smd: 1(-1.6,0) 2(1.6,0)
  silkscreen extent -0.4,-1.25 0.4,1.25, body extent -1.6,-1.22 1.6,1.28, height 2.5
CON-COAX [mm]
  rect 8x0.432 smd: 1(-4,0)
  rect 4x3 smd: 2(-2,-3.5) 3(-2,3.5)
  rect 4x3 smd far side: 4(-2,-3.5) 5(-2,3.5)
  body extent -3.76,-3.17 9.57,3.18, height 3.57
DO-214AA [mil] "Diode, DO-214AA"
  rect 85x110 smd: 1(175,0) 2(0,0)
  silkscreen extent 59,-28 118,28, body extent -20,-71 193,71, height 90
HDR1X2 [mm]
  rect 1.5x1.5 hole 0.9: 1(0,0)
  round 1.5 hole 0.9: 2(2.54,0)
  silkscreen extent -1.27,-1.27 3.81,1.27
L0603-0.8mm [mm] "Chip Capacitor, Body 1.6x0.8mm, IPC High Density"
  rrect30% 0.9x0.9 smd: 1(-0.75,0) 2(0.75,0)
  silkscreen extent 0,-0.4 0,0.4, body extent -0.8,-0.47 0.8,0.48, height 0.8
L1210 [mm]
  rect 1.3x2.7 smd: 1(-1.45,0) 2(1.45,0)
  silkscreen extent -0.4,-1.25 0.4,1.25, body extent -1.6,-1.25 1.6,1.25, height 2.5
LPF-0603-0.8mm [mm]
  rrect25% 0.66x0.302 smd mask+0.075: 1(-0.95,0) 3(0.95,0)
  rrect25% 0.81x0.71 smd mask+0.075: 2(0,-0.56) 4(0,0.56)
  silkscreen extent -0.75,-0.45 0.75,0.45, body extent -0.7,-0.4 0.71,0.41, height 0.61
MSOP8 [mm]
  rrect50% 1.02x0.41 smd: 1(-2.3,0.975) 2(-2.3,0.325) 3(-2.3,-0.325) 4(-2.3,-0.975) 5(2.3,-0.975) 6(2.3,-0.325) 7(2.3,0.325) 8(2.3,0.975)
  silkscreen extent -1.5,-1.57 1.5,1.53, body extent -2.46,-1.49 2.44,1.51, height 1.15
PDIP-8-(7.62mm)-SOCKET [mm]
  rect 1.3x1.3 hole 1: 1(0,0)
  round 1.3 hole 1: 2(2.54,0) 3(5.08,0) 4(7.62,0) 5(7.62,7.62) 6(5.08,7.62) 7(2.54,7.62) 8(0,7.62)
  silkscreen extent -1.33,-1.38 8.98,8.9, body extent -1.25,-1.3 8.91,8.86, height 5.1
QFN-24-(4x4) [mm]
  rrect20% 2.5x2.5 smd mask+0.05: 0(0,0)
  rrect50% 0.3x0.32 smd mask+0.05: 1(-1.71,1.25) 6(-1.71,-1.25) 7(-1.25,-1.71) 12(1.25,-1.71) 13(1.71,-1.25) 18(1.71,1.25) 19(1.25,1.71) 24(-1.25,1.71)
  rect 0.3x0.3 smd mask+0.05: 2(-1.71,0.75) 3(-1.71,0.25) 4(-1.71,-0.25) 5(-1.71,-0.75)
  rect 0.3x0.32 smd mask+0.05: 8(-0.75,-1.71) 9(-0.25,-1.71) 10(0.25,-1.71) 11(0.75,-1.71) 14(1.71,-0.75) 15(1.71,-0.25) 16(1.71,0.25) 17(1.71,0.75) 20(0.75,1.71) 21(0.25,1.71) 22(-0.25,1.71) 23(-0.75,1.71)
  silkscreen extent -1.4,-1.4 1.4,1.4, body extent -2,-2 2,2, height 1
Radial-SMD-8x10mm [mm]
  rrect50% 2.5x3.5 smd: 1(0,0) 2(0,6.5)
  silkscreen extent -4.15,-1.2 4.15,7.75, body extent -5.15,-2.3 5.15,8.7, height 11.1
SOD-123f [mm]
  rrect50% 1.2x1.2 smd: A(2.8,0) C(0,0)
  silkscreen extent -0.1,-1 2.9,1, body extent -0.4,-0.82 3.2,0.83, height 0.95
SOT-86 [mm]
  rect 1.524x1.524 smd: 1(-2.032,0) 3(2.032,0)
  round 0.35 hole 0.25: 2(-1.524,-2.667) 2(-1.143,-3.429) 2(-1.143,-1.905) 2(-0.762,-2.667) 2(-0.381,-3.429) 2(-0.381,-1.905) 2(0,-2.667) 2(0.381,-3.429) 2(0.381,-1.905) 2(0.762,-2.667) 2(1.143,-3.49) 2(1.143,-1.905) 2(1.524,-2.667) 4(-1.524,2.667) 4(-1.143,1.905) 4(-1.143,3.429) 4(-0.762,2.667) 4(-0.381,1.905) 4(-0.381,3.429) 4(0,2.667) 4(0.381,1.905) 4(0.381,3.429) 4(0.762,2.667) 4(1.143,1.905) 4(1.143,3.429) 4(1.524,2.667)
  rect 3.048x2.286 smd: 2(0,-2.667) 4(0,2.667)
  silkscreen extent -1.08,-1.08 1.08,1.08, body extent -2.54,-2.54 2.54,2.54, height 1.64
TO-263-4 [mm]
  rrect50% 1.5x4 smd: 1(-2.54,-5.3) 2(0,-5.3) 3(2.54,-5.3)
  rrect20% 10.7x8.6 smd: 2(0,5.3)
  body extent -5.2,-6.92 5.2,8.93, height 4.6
TP-LOOP [mm] "Test Point Loop 0.040\" (1mm) Hole Diameter"
  round 2 hole 1: 0(0,0)
  silkscreen extent -1.27,-1.27 1.27,1.27
TSSOP14 [mm]
  rect 0.42x1.78 smd: 1(-1.95,-2.97) 2(-1.3,-2.97) 3(-0.65,-2.97) 4(0,-2.97) 5(0.65,-2.97) 6(1.3,-2.97) 7(1.95,-2.97) 8(1.95,2.97) 9(1.3,2.97) 10(0.65,2.97) 11(0,2.97) 12(-0.65,2.97) 13(-1.3,2.97) 14(-1.95,2.97)
  silkscreen extent -2.46,-1.83 2.46,1.8, body extent -2.5,-3.2 2.5,3.2, height 1.1

## Part data
C1 C4: library part Radial-SMD-8x10mm, "CAP-POL"
C2 C3 C5 C8 C9 C12 C17: library part C0805-1.25MM, "Capacitor"
C6 C7 C13: library part 0402-0.55mm, "Capacitor"
C10 C22 C33 C34 C36 C37 C49 C51: library part EE-CAP-00003, "Capacitor"
C11 C23 C50: library part EE-CAP-00002, "Capacitor"
C14 C15 C30 C31: library part EE-CAP-00009, "Capacitor"
C16 C24 C28: library part EE-CAP-00010, "Capacitor"
C18 C19 C20 C21 C25 C26 C27: library part EE-CAP-00004, "Capacitor"
C29 C32: library part EE-CAP-00008, "Capacitor"
C35 C38: library part EE-CAP-00015, "Capacitor"
C39 C40 C41: library part EE-CAP-00013, "Capacitor"
C42 C43: library part EE-CAP-00012, "Capacitor"
C44 C45: library part EE-CAP-00014, "Capacitor"
C46: library part EE-CAP-00005, "Capacitor"
C47: library part EE-CAP-00007, "Capacitor"
C48: library part EE-CAP-00006, "Capacitor"
D1 D2 D4 D6 D7: library part 1A, "Schottky Diode"
D3: library part EE-DIODE-00004
D5 D8 D9 D10 D12: library part EE-DIODE-00003, "LED"
D11 D13: library part EE-DIODE-00002, "Schottky Diode"
F1 F2: library part EE-FER-00001
J1 J2 J3 J4 J5 J6 J7 J8 J9 J10 J11 J12 J13 J18 J19 J21 J22 J36 J37 J38 J39 J40 J41 J42 J43 J44 J45 J46 J47 J48 J49 J50 J51 J52 J53 J56 J58 J60 J61 J62 J63 J64 J65 J66 J67 J68 J69 J70 J71 J72 J73 J74 J75 J76 J77 J78 J79 J80 J81 J82 J83 J84 J85 J86 J87 J88 J89 J90 J91 J92 J93 J94 J95 J96: library part EE-GEN-00001, "Generic Component"
J16 J17 J24 J25 J30 J31 J34 J35 J54 J57 J59: library part EE-GEN-00002, "Generic Component"
J26 J29 J55: library part EE-CON-00001
L1: library part 1.4A, "Inductor"
L2 L3: library part 800mA, "Inductor"
L4: library part EE-L-00005, "Inductor"
L5: library part EE-L-00006, "Inductor"
LPF1 LPF2: library part EE-FILTER-00001
P1: library part EM-CON-00012
R1 R5 R6 R7 R11 R12 R15 R26 R34 R36 R38 R40 R42 R43: library part EM-RES-01617
R2 R8 R27: library part EM-RES-01370
R3: library part EM-RES-01196
R4: library part EM-RES-01238
R9: library part EM-RES-01252
R10 R13 R14: library part EM-RES-01285
R16 R17 R18: library part 0402-0.55mm
R19 R20 R21 R22 R23 R24: library part EM-RES-01452
R25: library part EM-RES-01089
R28: library part EE-POT-00002, "POTENTIOMETER"
R29: library part EM-RES-01607
R30: library part EM-RES-01028
R31: library part EM-RES-01180
R32 R33: library part EM-RES-01484
R35 R37: library part EE-POT-00003, "POTENTIOMETER"
R39: library part EM-RES-01374
R41: library part EM-RES-01318
TP1 TP2 TP3 TP4 TP5 TP6 TP7 TP8 TP9 TP10 TP11 TP12 TP13 TP14 TP15 TP16 TP17 TP18 TP19 TP20 TP21 TP22 TP23 TP24 TP25 TP26 TP27: library part EM-TP-00006
U1 U3: library part EE-VREG-00004
U2 U4: library part EE-VREG-00002
U5: library part EE-VREG-00003
U6: library part QFN-24-(4x4)
U7 U8: library part SOT-86
U9: library part EE-OPAMP-00002, "OP284"
U10: library part PDIP-8-(7.62mm)-SOCKET, "OP284"
U11: library part TSSOP14, "Quad Op-Aamp"

## Free pads (board coordinates)
  round 75 hole 50: 0(3900,1750)

## Via types
v1: diameter 30, hole 15, Top Layer to Bottom Layer, tented both sides, 3 vias

## Nets (pads, with @x,y where several pads share a name; then routed paths per layer and width w, separated by ;. In a path a pad name is that pad's centre, name@x,y a point inside that pad or via, vN(x,y) a via of type N, cw(c..) or ccw(c..) an arc to the next point about the centre after c; other vN are vias at no path point)
5V-FILTER: R15.2 TP10.0 TP17.0 U11.3
5V-TS: R11.2 TP8.0
5V-VCO: C26.1 C27.1 F1.2 R12.1 TP9.0 U5.1 U5.2
8V: C22.2 C23.2 C33.2 C34.2 C36.2 C37.2 J5.2 J6.1 R5.1 R7.2 R21.2 R24.2 U4.1 U4.2
20V: C7.2 C8.2 C39.2 C40.2 C44.1 C45.1 C51.2 D1.A D4.C F2.1 J50.1 J52.1 L4.2 R1.2 R2.2 R3.2 R6.1 R35.1 R37.1 TP2.0 U1.2 U10.8
FILT-IN: C49.2 C50.2 F2.2 U11.4
FILTER-REG: C25.1 J12.1 R15.1 U5.3
GND: C1.1 C2.1 C3.1 C4.1 C5.1 C6.1 C7.1 C8.1 C9.1 C10.1 C11.1 C12.1 C13.1 C14.1 C15.1 C16.1 C17.1 C18.1 C19.1 C20.1 C21.1 C22.1 C23.1 C24.1 C25.2 C26.2 C27.2 C28.1 C30.1 C31.1 C33.1 C34.1 C36.1 C37.1 C39.1 C40.1 C41.2 C44.2 C45.2 C46.1 C47.1 C48.1 C49.1 C50.1 C51.1 D3.1 D5.C D8.C J3.2 J4.2 J6.2 J7.2 J10.2 J11.2 J13.2 J16.2 J17.2 J21.2 J22.2 J24.2 J25.2 J26.2 J26.3 J26.4 J26.5 J29.2 J29.3 J29.4 J29.5 J30.2 J31.2 J34.2 J35.2 J37.1 J38.1 J42.1 J43.1 J44.2 J45.1 J46.2 J47.2 J49.2 J50.2 J51.2 J52.2 J53.2 J55.2 J55.3 J55.4 J55.5 J56.2 J57.2 J58.2 J59.2 J63.2 J66.1 J67.1 J72.2 J73.2 J74.2 J75.1 J76.1 J78.1 J79.1 J84.2 J85.2 J86.1 J87.1 J88.1 J89.1 J93.2 J94.2 J95.1 J96.1 LPF1.2 LPF1.4 LPF2.2 LPF2.4 P1.1 pad.0 R4.1 R10.1 R13.1 R14.1 R28.2 R28.3 R29.1 R30.1 R31.1 R32.1 R33.1 R35.3 R37.3 TP3.0 TP4.0 TP5.0 TP6.0 TP21.0 U2.5 U2.6 U2.7 U2.8 U4.5 U4.6 U4.7 U4.8 U5.5 U5.6 U5.7 U5.8 U6.0 U6.1 U6.2 U6.3 U6.5 U6.6 U6.7 U6.8 U6.9 U6.10 U6.11 U6.13 U6.14 U6.16 U6.17 U6.18 U6.19 U6.20 U6.21 U6.22 U6.23 U6.24 U7.2 U7.4 U8.2 U8.4 U9.4 U10.4 U11.11 | length 150.2
  Top Layer w25: v1(1285,4115) D3.1 ; v1(1450,4350) C2.1 ; v1(1570,4360) J3.2
LOOP_FILTER_OUT: J48.1 R30.2 R40.2 U9.3
NetC1_2: C1.2 C2.2 D2.C D3.2 J1.2 J3.1 L1.1 | length 375.8
  Top Layer w25: D3.2 1340,4410 D2.C 1447.4,4475 C2.2 1452.4,4470 1454.8,4472.4 J3.1
NetC9_2: C9.2 D4.A R2.1 R4.2 U1.1
NetC10_2: C10.2 C11.2 J5.1 J7.1 R5.2 U2.1 U2.2
NetC12_2: C12.2 C13.2 D6.C R6.2 U3.3
NetC14_2: C14.2 C15.2 D6.A D7.C R7.1 R8.2 R9.2 TP7.0 U3.2
NetC16_2: C16.2 U2.4
NetC17_2: C17.2 D7.A R8.1 R10.2 U3.1
NetC24_2: C24.2 U4.4
NetC28_2: C28.2 U5.4
NetC29_1: C29.1 R16.2 | length 34.5
  Top Layer w17: R16.2 C29.1
NetC30_2: C30.2 C31.2 J18.1 J19.1 J22.1 U6.12
NetC32_1: C32.1 R18.2 | length 31.5
  Top Layer w17: R18.2@4112.42,1697.58 C32.1
NetC35_1: C35.1 L2.1 U7.3 | length 118.3
  Top Layer w17: U7.3 C35.1
NetC38_1: C38.1 L3.1 U8.3 | length 118.3
  Top Layer w17: U8.3 C38.1
NetC41_1: C41.1 L4.1 U9.8
NetC42_1: C42.1 R32.2
NetC43_1: C43.1 R33.2
NetC46_2: C46.2 J54.1 J56.1 J57.1 R38.2 R39.1 R41.2
NetC47_2: C47.2 J54.2 J58.1 R39.2 R40.1
NetC48_2: C48.2 J59.1 R41.1
NetD2_A: D2.A P1.2 | length 139.8
  Top Layer w25: P1.2 D2.A
NetD5_A: D5.A R3.1
NetD8_A: D8.A R9.1
NetD9_C: D9.C R13.2
NetD10_C: D10.C R14.2
NetD12_C: D12.C R31.2
NetF1_1: F1.1 J18.2 J19.2 J21.1
NetJ1_1: J1.1 J2.2
NetJ8_2: J8.2 J10.1
NetJ9_2: J9.2 J11.1
NetJ12_2: J12.2 J13.1
NetJ26_1: J26.1 LPF1.3 | length 185.1
  Top Layer w17: LPF1.3 J26.1
NetJ29_1: J29.1 LPF2.3 | length 185.1
  Top Layer w17: LPF2.3 J29.1
NetJ36_1: J36.1 J40.1 J44.1 U9.7
NetJ36_2: J36.2 J38.2 J39.1 U9.6
NetJ37_2: J37.2 J39.2 TP11.0
NetJ40_2: J40.2 J45.2 TP12.0
NetJ41_1: J41.1 J42.2 TP13.0
NetJ41_2: J41.2 J43.2 U9.5
NetJ46_1: J46.1 J47.1 R25.2 R27.1 U9.1
NetJ48_2: J48.2 J49.1
NetJ60_1: J60.1 J61.2
NetJ60_2: J60.2 J62.2 J64.2 U11.2
NetJ61_1: J61.1 J62.1 J68.2 U11.1
NetJ63_1: J63.1 J64.1 R42.2
NetJ65_1: J65.1 J70.1 J75.2 U11.7
NetJ65_2: J65.2 J67.2 J69.1 U11.6
NetJ66_2: J66.2 J69.2 TP18.0
NetJ68_1: J68.1 J72.1 R43.1
NetJ70_2: J70.2 J76.2 TP19.0
NetJ71_1: J71.1 J74.1 U11.5
NetJ71_2: J71.2 J73.1 TP20.0
NetJ77_1: J77.1 J81.1 J86.2 U11.14
NetJ77_2: J77.2 J79.2 J80.1 U11.13
NetJ78_2: J78.2 J80.2 TP22.0
NetJ81_2: J81.2 J87.2 TP23.0
NetJ82_1: J82.1 J85.1 U11.12
NetJ82_2: J82.2 J84.1 TP24.0
NetJ83_1: J83.1 J91.1 J95.2 U11.8
NetJ83_2: J83.2 J89.2 J90.1 U11.9
NetJ88_2: J88.2 J90.2 TP25.0
NetJ91_2: J91.2 J96.2 TP26.0
NetJ92_1: J92.1 J94.1 U11.10
NetJ92_2: J92.2 J93.1 TP27.0
NetL2_2: L2.2 R19.1
NetL3_2: L3.2 R22.1
NetR16_1: R16.1 R17.2 R18.1 | length 59
  Top Layer w17: R17.2 R17.2@4054.68,1740 ; R18.1 R17.2@4054.68,1740 ; R16.1 4060,1740 R17.2@4054.68,1740
NetR17_1: R17.1 U6.15 | length 36.1
  Top Layer w12: U6.15 4003.19,1740.16 R17.1
NetR19_2: R19.2 R20.1
NetR20_2: R20.2 R21.1
NetR22_2: R22.2 R23.1
NetR23_2: R23.2 R24.1
NetR25_1: R25.1 R28.1 R29.2 U9.2
NetR34_1: R34.1 TP15.0 U10.6 U10.7
NetR35_2: R35.2 U10.5
NetR36_1: R36.1 TP16.0 U10.1 U10.2
NetR37_2: R37.2 U10.3
OP-3V: D13.A J53.1 R36.2
OP-10V: D11.C J51.1 R34.2
OP_OUT: C42.2 D11.A D12.A D13.C L5.1 R26.1 R27.2 R43.2
PLL_CHG_PUMP: J55.1 R38.1 R42.1
RF1: C29.2 J16.1 J17.1 U7.1 | length 87.3
  Top Layer w17: C29.2 4215,1895 U7.1
RF1OUT: C35.2 J30.1 J31.1 LPF1.1 | length 40.9
  Top Layer w17: C35.2 LPF1.1
RF2: C32.2 J24.1 J25.1 U8.1 | length 80.3
  Top Layer w17: C32.2 4215,1595 U8.1
RF2OUT: C38.2 J34.1 J35.1 LPF2.1 | length 40.9
  Top Layer w17: C38.2 LPF2.1
TS-REG: C18.2 C19.2 D9.A J8.1 R11.1 U4.3
VCO-REG: C20.2 C21.2 D10.A J9.1 R12.2 U2.3
VIN: C3.2 C4.2 C5.2 C6.2 D1.C J2.1 J4.1 L1.2 R1.1 TP1.0 U1.3
VTUNE: C43.2 L5.2 R26.2 TP14.0 U6.4

## Polygon pours and split planes (outlines as drawn)
GND on GND "GND" (solid, pour order 2): 1000,4775 1000,4900 cw(c1100,4900) 1100,5000 1375,5000 4775,5000 4900,5000 cw(c4900,4900) 5000,4900 5000,4765 5000,1175 5000,1100 cw(c4900,1100) 4900,1000 1225,1000 1100,1000 cw(c1100,1100) 1000,1100 1000,4775
GND on GND (Mid2) "GND" (solid, pour order 4): 1240,5000 4900,5000 cw(c4900,4900) 5000,4900 5000,4645 5000,1100 cw(c4900,1100) 4900,1000 4670,1000 1100,1000 cw(c1100,1100) 1000,1100 1000,1295 1000,4900 cw(c1100,4900) 1100,5000 1240,5000
NetC1_2 on Top Layer "NetC1_2" (solid, pour order 6): 1340,4355 1340,4380 1405,4445 2575,4445 2575,4650 2205,4650 2205,4750 1420,4750 1295,4625 1295,4355